# EAGLE board ModuleCapteur (EAGLE 5.06)
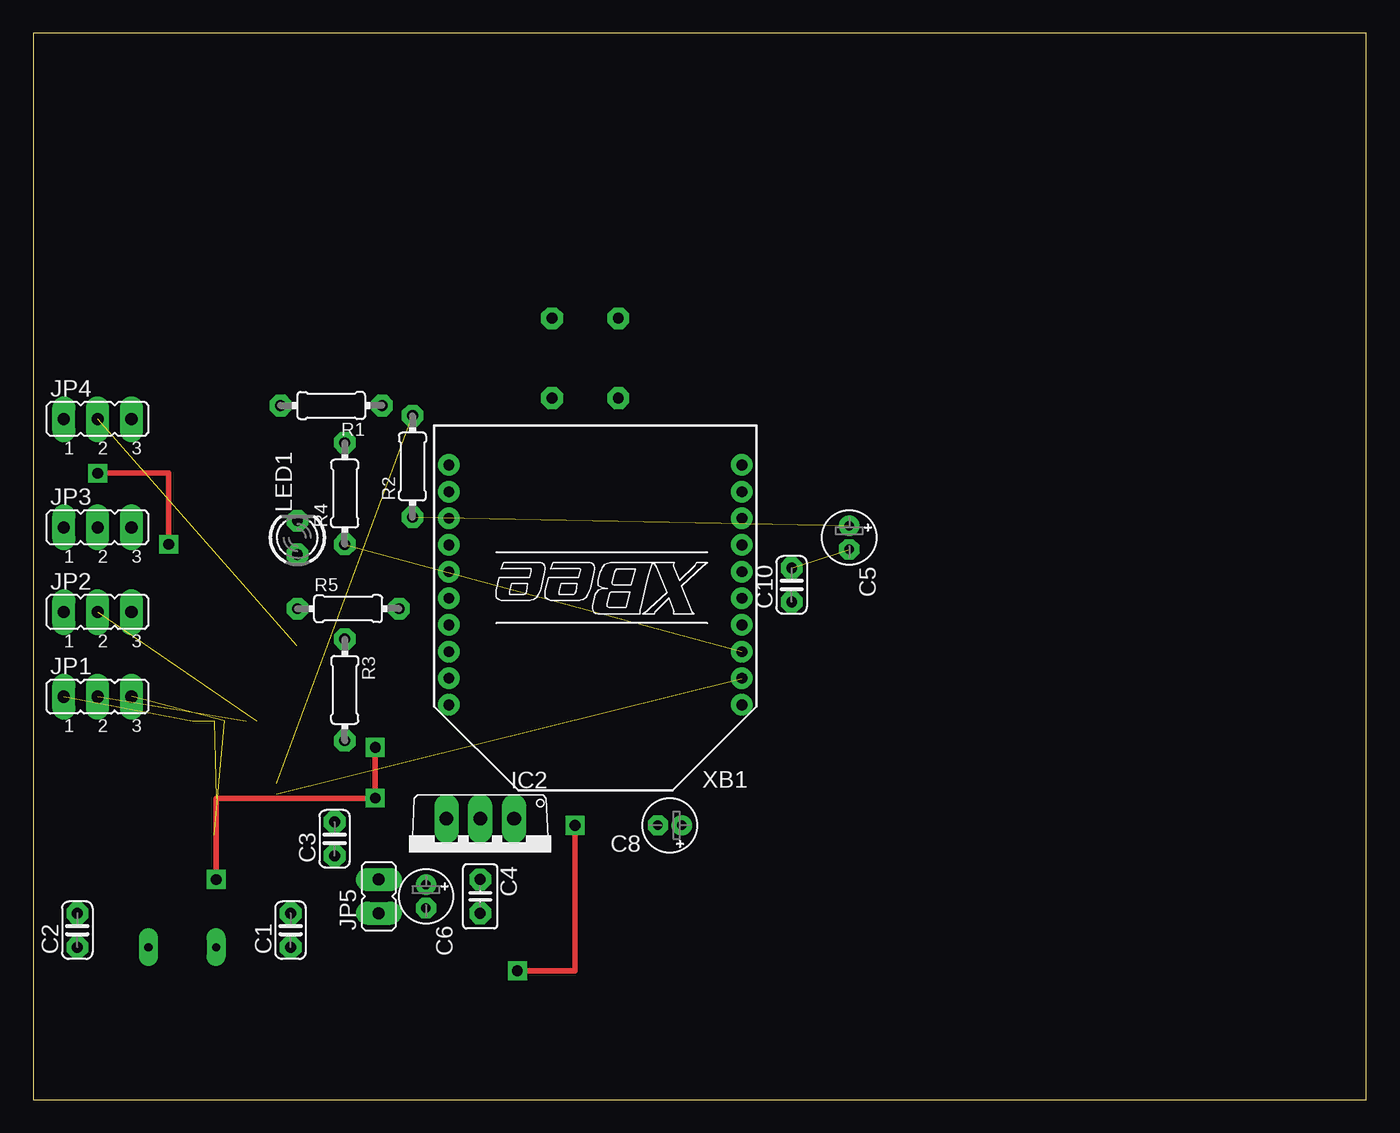
[diagram p0: board, top side]
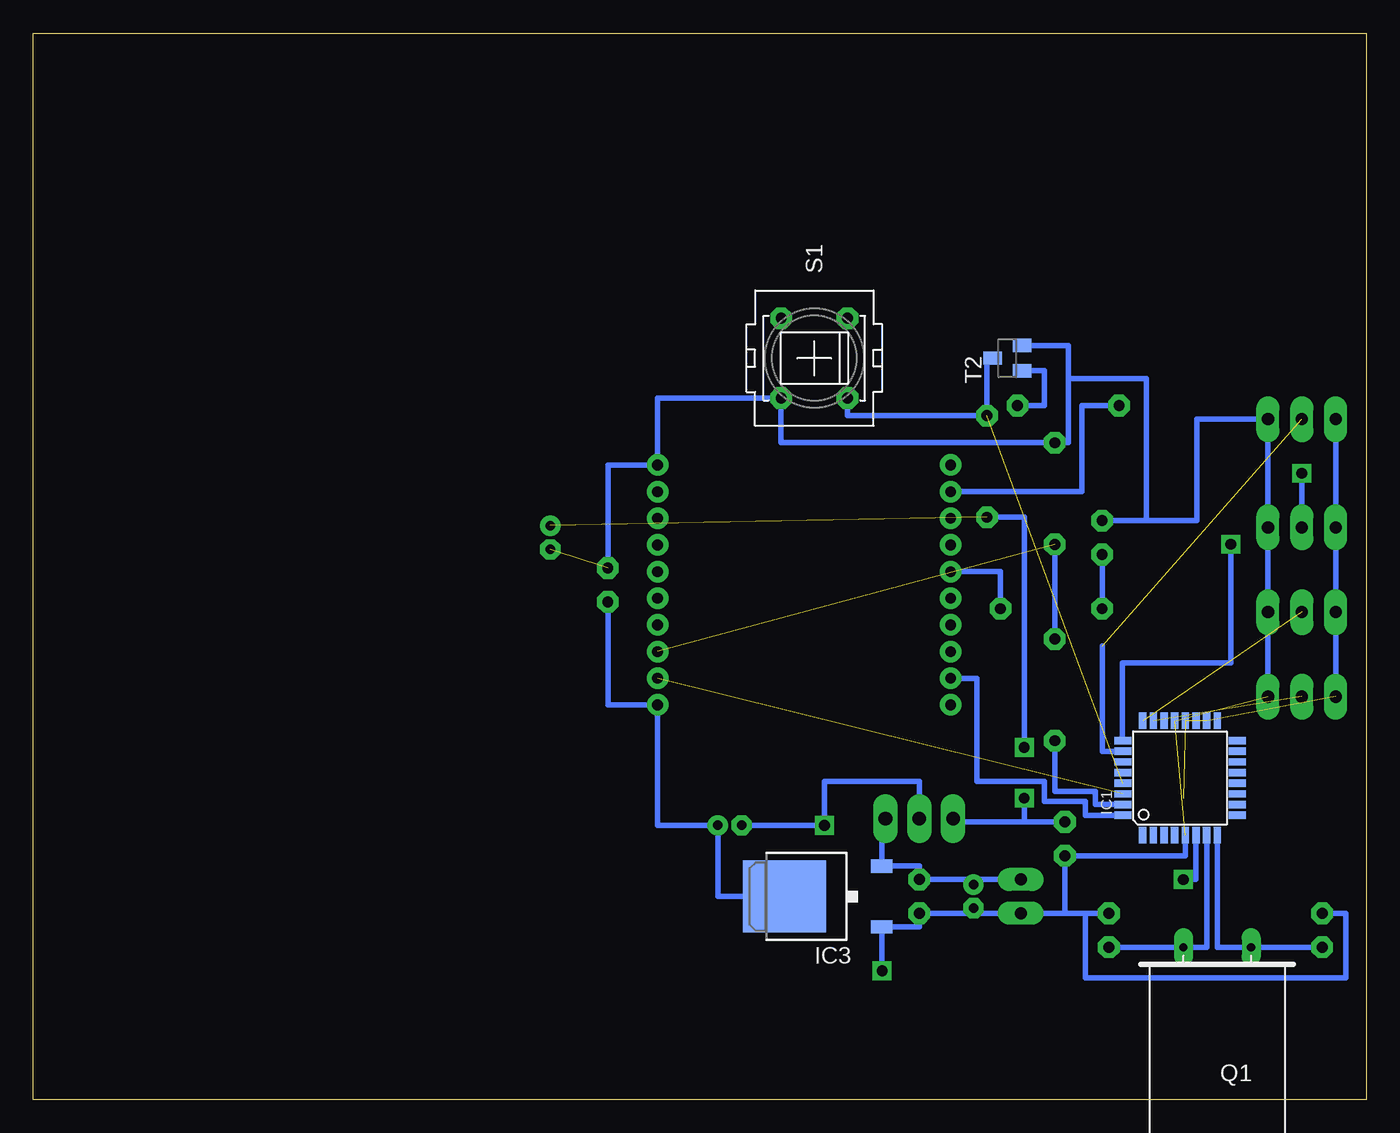
[diagram p1: board, bottom side, seen from below]

Size 100 x 80 mm. Coordinates in mm from the lower left corner, seen from the top.
Outline: 0,0 100,0 100,80 0,80 0,0
Copper layers (1*16): Top 0.035mm / dielectric 1.5mm / Bottom 0.035mm
Design rules "DesignRules": minimum track width 16mil, minimum drill 24mil, track to track 14mil, track to pad 12mil, pad to pad 8mil, via to via 16mil, smd to smd 8mil, copper to edge 40mil, drill to drill 8mil, minimum pad ring 16mil, minimum via ring 12mil, stop-mask expansion 4mil, vias tented up to drill 0mil, thermal gap 10mil

## Footprints (pad centres in the part's own frame; a part is rotated, then mirrored left to right if it is on the bottom)
C025-024X044 = drill 0.813 octagon: 1 -1.27,0; 2 1.27,0
C025-025X050 = drill 0.813 octagon: 1 -1.27,0; 2 1.27,0
E1,8-4 = drill 0.711 pad 1.168 round: + -0.889,0 | drill 0.711 pad 1.168 octagon: - 0.889,0
TQFP32-08 = smd 1.27 x 0.559: 1 -4.293,2.8; 2 -4.293,2; 3 -4.293,1.2; 4 -4.293,0.4; 5 -4.293,-0.4; 6 -4.293,-1.2; 7 -4.293,-2; 8 -4.293,-2.8; 17 4.293,-2.8; 18 4.293,-2; 19 4.293,-1.2; 20 4.293,-0.4; 21 4.293,0.4; 22 4.293,1.2; 23 4.293,2; 24 4.293,2.8 | smd 0.559 x 1.27: 9 -2.8,-4.293; 10 -2,-4.293; 11 -1.2,-4.293; 12 -0.4,-4.293; 13 0.4,-4.293; 14 1.2,-4.293; 15 2,-4.293; 16 2.8,-4.293; 25 2.8,4.293; 26 2,4.293; 27 1.2,4.293; 28 0.4,4.293; 29 -0.4,4.293; 30 -1.2,4.293; 31 -2,4.293; 32 -2.8,4.293
TO220V = drill 1.016 long: 1 -2.54,-2.54; 2 0,-2.54; 3 2.54,-2.54
DPACK = smd 1 x 1.6: 1 -2.28,-4.8; 3 2.28,-4.8 | smd 5.4 x 6.2: 2 0,2.5
JP2 = drill 0.914 long: 1 -2.54,0; 2 0,0; 3 2.54,0
JP1 = drill 0.914 long: 1 0,-1.27; 2 0,1.27
LED3MM = drill 0.813 octagon: A -1.27,0; K 1.27,0
Q = drill 0.61 long: 1 -2.54,-7.62; 2 2.54,-7.62
0204/7 = drill 0.813 octagon: 1 -3.81,0; 2 3.81,0
PVA1R = drill 0.813 octagon: 1 -2.997,2.489; 2 -2.997,-2.489; 3 2.997,2.489; 4 2.997,-2.489
SOT23 = smd 1 x 1.4: 1 -0.95,-1.1; 2 0.95,-1.1; 3 0,1.1
XBEE = drill 0.8 pad 1.27 round: 1 -11,9; 2 -11,7; 3 -11,5; 4 -11,3; 5 -11,1; 6 -11,-1; 7 -11,-3; 8 -11,-5; 9 -11,-7; 10 -11,-9; 11 11,-9; 12 11,-7; 13 11,-5; 14 11,-3; 15 11,-1; 16 11,1; 17 11,3; 18 11,5; 19 11,7; 20 11,9

## Placement (x,y rotation side)
C1  22p  [C025-024X044]  19.3,12.7 90 top
C2  22p  [C025-024X044]  3.3,12.7 90 top
C3  100n  [C025-024X044]  22.61,19.56 90 top
C4  100n  [C025-025X050]  33.53,15.24 270 top
C5  100µ  [E1,8-4]  61.21,42.16 270 top
C6  100µ  [E1,8-4]  29.46,15.24 270 top
C8  100µ  [E1,8-4]  47.75,20.57 180 top
C10  100n  [C025-024X044]  56.9,38.61 90 top
IC1  MEGA8-AI  [TQFP32-08]  13.97,24.13 90 bottom
IC2  7805TV  [TO220V]  33.53,18.54 180 top
IC3  MC33269D-3.3  [DPACK]  41.15,15.24 90 bottom
JP1  [JP2]  4.83,30.23 0 top
JP2  [JP2]  4.83,36.58 0 top
JP3  [JP2]  4.83,42.93 0 top
JP4  [JP2]  4.83,51.05 0 top
JP5  [JP1]  25.91,15.24 0 top
LED1  [LED3MM]  19.81,42.16 90 top
Q1  16M  [Q]  11.18,3.81 180 bottom
R1  1K  [0204/7]  22.35,52.07 180 top
R2  10K  [0204/7]  28.45,47.5 90 top
R3  3300  [0204/7]  23.37,30.73 270 top
R4  2200  [0204/7]  23.37,45.47 90 top
R5  1K  [0204/7]  23.62,36.83 0 top
S1  PVA1R  [PVA1R]  41.4,55.63 90 bottom
T2  BC848  [SOT23]  26.92,55.63 90 bottom
XB1  XBEE  [XBEE]  42.16,38.61 180 top

## Library data of the parts
C1-C6 C8 C10 R1 = rcl
IC1 = atmel
IC2 IC3 = linear
JP1-JP5 = jumper
LED1 = led
Q1 = special
R2-R5 = resistor
S1 = switch-misc
T2 = transistor
XB1 = maxstream

## Nets
GND: IC1.3
N$1: C1.2 C2.2 C3.1 C4.2 C5.- C6.- C8.- C10.2 IC1.5 IC1.21 IC2.2 IC3.1 JP1.3 JP2.3 JP3.3 JP4.3 JP5.1 LED1.K R4.2 S1.1 T2.2 XB1.10
N$2: C1.1 IC1.7 Q1.2
N$3: C2.1 IC1.8 Q1.1
N$4: R1.1 T2.1
N$5: C3.2 C5.+ IC1.6 IC1.18 IC1.20 IC2.3 JP1.1 JP2.1 JP3.1 JP4.1 R2.1
N$6: IC1.29 R2.2 S1.2 T2.3
N$7: IC1.32 XB1.19
N$8: IC1.31 R3.2
N$9: R3.1 R4.1 XB1.3
N$10: C8.+ C10.1 IC3.2 XB1.1
N$11: IC1.30 XB1.2
N$12: IC1.23 JP1.2
N$13: LED1.A R5.1
N$14: R5.2 XB1.15
N$15: IC1.24 JP2.2
N$16: IC1.25 JP3.2
N$17: IC1.26 JP4.2
N$18: R1.2 XB1.12
N$19: C4.1 C6.+ IC2.1 IC3.3 JP5.2
VCC: IC1.4

## Tracks (layer width: path | path; a pad name or v marks a point on that pad's centre or on a via)
N$1  (via drill 0.8)  (3 unrouted)
  Top 0.406: v40.64,20.57 40.64,9.65 v36.32,9.65
  Bottom 0.406: C2.2 1.52,13.97 1.52,9.14 21.08,9.14 21.08,13.97 C1.2 22.61,13.97 | IC1.5 13.57,18.29 C3.1 22.61,13.97 | 22.61,13.97 JP5.1 29.46,13.97 | 29.46,13.97 C6.- | 29.46,13.97 C4.2 33.53,12.96 IC3.1 36.35,9.65 v36.32,9.65 | IC2.2 33.53,23.88 40.64,23.88 v40.64,20.57 C8.- | C10.2 56.9,47.61 XB1.10 53.16,52.63 S1.1 43.89,49.28 R4.2 22.35,49.28 22.35,53.85 | T2.2 22.35,56.58 22.35,53.85 | JP4.3 JP3.3 | JP1.3 JP2.3 | JP2.3 JP4.3 | JP2.3 JP4.3 | 16.51,43.43 LED1.K | 16.51,43.43 16.51,54.1 22.35,54.1 22.35,53.85 | 16.51,43.43 12.7,43.43 12.7,51.05 JP4.3
N$2
  Bottom 0.406: IC1.7 11.97,11.43 Q1.2 C1.1
N$3
  Bottom 0.406: IC1.8 11.17,11.43 Q1.1 C2.1
N$4
  Bottom 0.406: T2.1 24.13,54.68 24.13,52.07 R1.1
N$5  (via drill 0.8)  (4 unrouted)
  Top 0.406: v13.72,16.51 13.72,22.61 v25.65,22.61 v25.65,26.42
  Bottom 0.406: IC2.3 30.99,20.83 25.65,20.83 | 25.65,20.83 C3.2 | v25.65,22.61 25.65,20.83 | v13.72,16.51 12.77,16.51 IC1.6 | JP3.1 JP4.1 JP2.1 JP1.1 | R2.1 25.65,43.69 v25.65,26.42
N$6  (1 unrouted)
  Bottom 0.406: T2.3 28.45,55.63 R2.2 38.91,51.31 S1.2
N$7
  Bottom 0.406: IC1.32 21.08,21.33 21.08,22.35 24.13,22.35 24.13,23.88 29.21,23.88 29.21,31.61 XB1.19
N$8
  Bottom 0.406: IC1.31 20.32,22.13 20.32,23.11 23.37,23.11 R3.2
N$9  (1 unrouted)
  Bottom 0.406: R3.1 R4.1
N$10
  Bottom 0.406: IC3.2 48.64,15.24 C8.+ 53.16,20.57 XB1.1 56.9,29.61 C10.1
N$11  (1 unrouted)
N$12  (1 unrouted)
N$13
  Bottom 0.406: LED1.A R5.1
N$14
  Bottom 0.406: R5.2 27.43,39.61 XB1.15
N$15  (1 unrouted)
N$16  (via drill 0.8)
  Top 0.406: v10.16,41.66 10.16,46.99 v4.83,46.99
  Bottom 0.406: IC1.25 18.29,26.93 18.29,32.77 10.16,32.77 v10.16,41.66 | v4.83,46.99 JP3.2
N$17  (1 unrouted)
  Bottom 0.406: IC1.26 19.81,26.13 19.81,34.04
N$18
  Bottom 0.406: R1.2 21.34,52.07 21.34,45.61 XB1.12
N$19
  Bottom 0.406: JP5.2 29.72,16.51 | 29.72,16.51 C4.1 33.53,17.52 IC3.3 36.35,21.34 IC2.1 | 29.72,16.51 C6.+